# EAGLE board BusPirate-v3b (EAGLE 5.06)
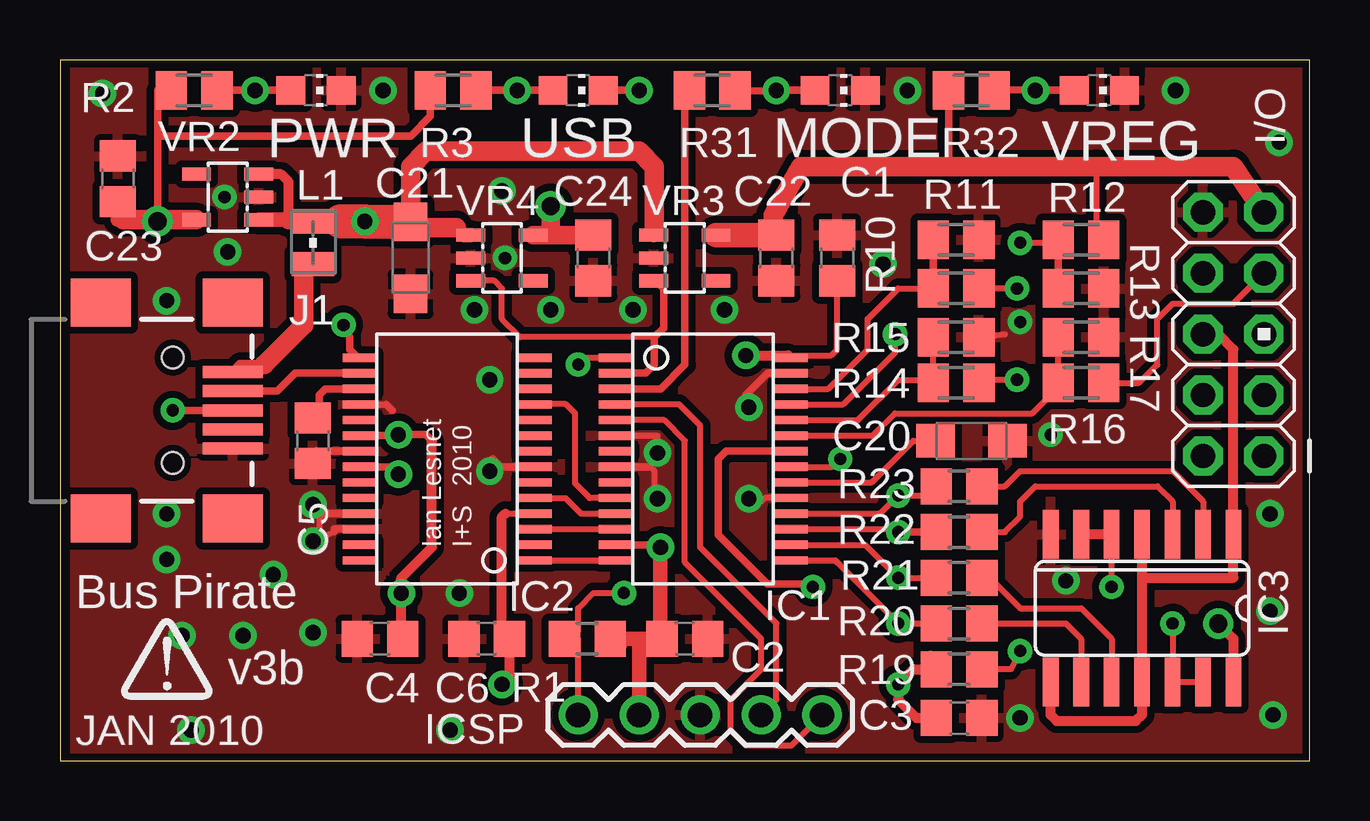
[diagram p0: board, top side]
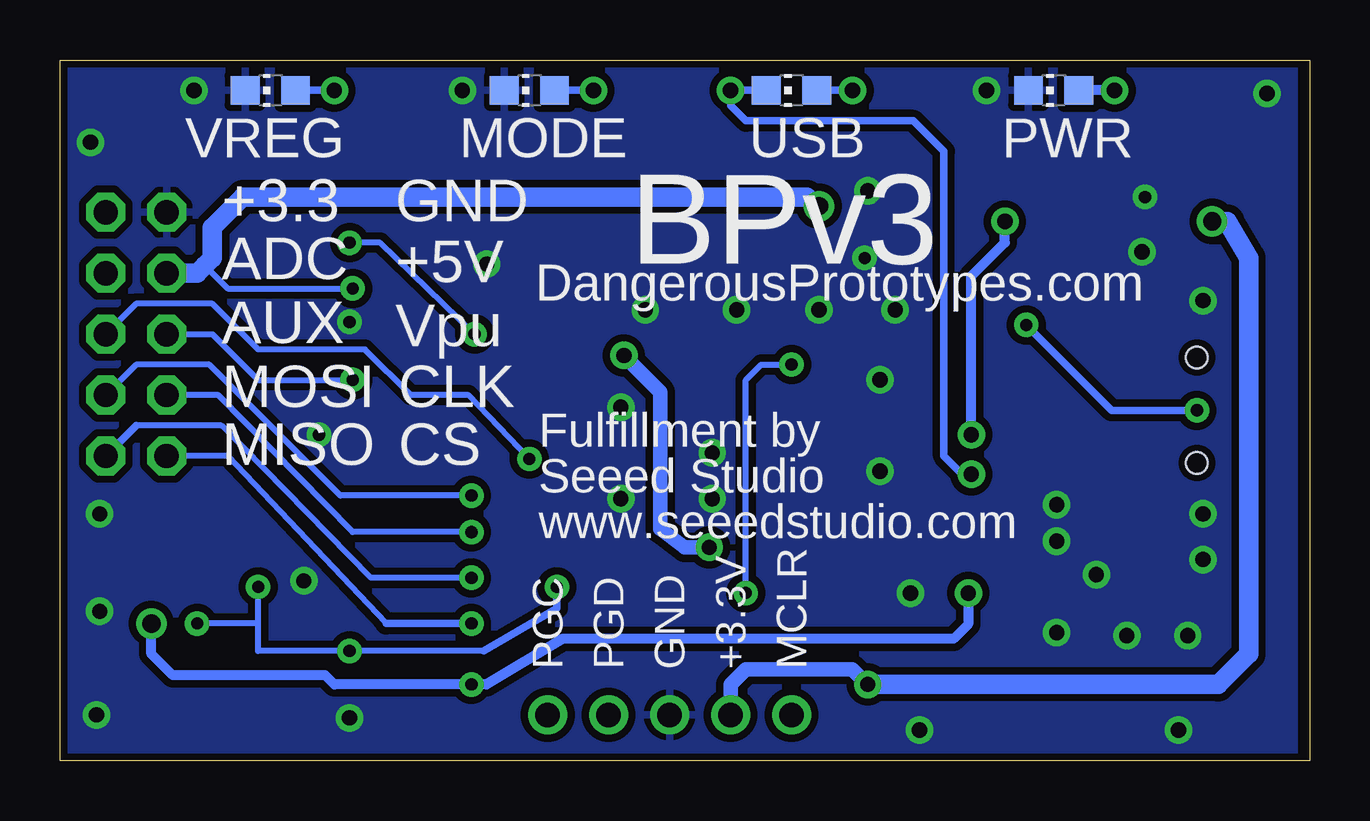
[diagram p1: board, bottom side, seen from below]

Size 52.07 x 29.21 mm. Coordinates in mm from the lower left corner, seen from the top.
Outline: 0,29.21 0,0 52.07,0 52.07,29.21 0,29.21
Copper layers (1*16): Top 0.035mm / dielectric 1.5mm / Bottom 0.035mm
Design rules "SparkFun": minimum track width 8mil, minimum drill 20mil, track to track 8mil, track to pad 8mil, pad to pad 8mil, via to via 8mil, smd to smd 8mil, copper to edge 10mil, drill to drill 8mil, minimum pad ring 12mil, minimum via ring 10mil, stop-mask expansion 4mil, vias tented up to drill 25mil, thermal gap 10mil
tRestrict: area 12.1,9.9 to 13,10

## Footprints (pad centres in the part's own frame; a part is rotated, then mirrored left to right if it is on the bottom)
C0805 = smd 1.3 x 1.5: 1 -0.95,0; 2 0.95,0
SMC_A = smd 1.6 x 1.4: + -1.5,0; - 1.5,0
AVR_ICSP = drill 1.016 octagon: 1 -1.27,5.08; 2 1.27,5.08; 3 -1.27,2.54; 4 1.27,2.54; 5 -1.27,0; 6 1.27,0; 7 -1.27,-2.54; 8 1.27,-2.54; 9 -1.27,-5.08; 10 1.27,-5.08
SSOP28DB = smd 0.348 x 1.397: 1 -4.225,-3.656; 2 -3.575,-3.656; 3 -2.925,-3.656; 4 -2.275,-3.656; 5 -1.625,-3.656; 6 -0.975,-3.656; 7 -0.325,-3.656; 8 0.325,-3.656; 9 0.975,-3.656; 10 1.625,-3.656; 11 2.275,-3.656; 12 2.925,-3.656; 13 3.575,-3.656; 14 4.225,-3.656; 15 4.225,3.656; 16 3.575,3.656; 17 2.925,3.656; 18 2.275,3.656; 19 1.625,3.656; 20 0.975,3.656; 21 0.325,3.656; 22 -0.325,3.656; 23 -0.975,3.656; 24 -1.625,3.656; 25 -2.275,3.656; 26 -2.925,3.656; 27 -3.575,3.656; 28 -4.225,3.656
SO14 = smd 0.66 x 2.032: 1 -3.81,-3.073; 2 -2.54,-3.073; 3 -1.27,-3.073; 4 0,-3.073; 5 1.27,-3.073; 6 2.54,-3.073; 7 3.81,-3.073; 8 3.81,3.073; 9 2.54,3.073; 10 1.27,3.073; 11 0,3.073; 12 -1.27,3.073; 13 -2.54,3.073; 14 -3.81,3.073
1X05 = drill 1.016 round: 1 0,0; 2 2.54,0; 3 5.08,0; 4 7.62,0; 5 10.16,0
USB-MINIB = smd 2.5 x 0.5: D+ 2.5,0; D- 2.5,0.8; GND 2.5,-1.6; ID 2.5,-0.8; VBUS 2.5,1.6 | smd 2.5 x 2: GND@1 -3,-4.5; GND@2 -3,4.5; GND@3 2.5,4.5; GND@4 2.5,-4.5 | hole 0.9: 0,2.2; 0,-2.2
WE-KI_0805_B = smd 1.02 x 1.78: 1 -0.89,0; 2 0.89,0
CHIP-LED0805 = smd 1.2 x 1.2: A 0,-1.05; C 0,1.05
R0805 = smd 1.3 x 1.5: 1 -0.95,0; 2 0.95,0
M0805 = smd 1.3 x 1.6: 1 -0.95,0; 2 0.95,0
SOT23-5 = smd 0.55 x 1.2: 1 -0.95,-1.3; 2 0,-1.3; 3 0.95,-1.3; 4 0.95,1.3; 5 -0.95,1.3

## Placement (x,y rotation side)
C1  0.1uF  [C0805]  32.38,20.95 90 top
C2  0.1uF  [C0805]  26.04,5.08 0 top
C3  0.1uf  [C0805]  37.46,1.78 0 top
C4  0.1uF  [C0805]  13.33,5.08 180 top
C5  0.1uF  [C0805]  10.54,13.34 270 top
C6  0.1uF  [C0805]  17.78,5.08 180 top
C20  10uF  [SMC_A]  37.97,13.34 0 top
C21  10uF  [SMC_A]  14.61,20.95 270 top
C22  1uF  [C0805]  29.85,20.95 270 top
C23  1uf  [C0805]  2.41,24.26 90 top
C24  1uF  [C0805]  22.23,20.95 270 top
I/O  M05X2PTH  [AVR_ICSP]  48.89,17.78 180 top
IC1  PIC24FJ64GA002-I/SSSS-ALTERNATE  [SSOP28DB]  26.8,12.57 270 top
IC2  FT232RLSSOP  [SSOP28DB]  16.13,12.57 90 top
IC3  4066D  [SO14]  45.09,6.35 180 top
ICSP  M05X1PTH  [1X05]  21.59,1.91 0 top
J1  USBSMD  [USB-MINIB]  4.7,14.61 0 top
L1  700mA+ ferrite bead  [WE-KI_0805_B]  10.54,21.59 270 top
LED1  [CHIP-LED0805]  10.67,27.94 270 top
LED1A  [CHIP-LED0805]  10.67,27.94 90 bottom
LED2  [CHIP-LED0805]  32.51,27.94 270 top
LED2A  [CHIP-LED0805]  32.51,27.94 90 bottom
LED3  [CHIP-LED0805]  43.31,27.94 270 top
LED3A  [CHIP-LED0805]  43.31,27.94 90 bottom
LED4  [CHIP-LED0805]  21.59,27.94 270 top
LED4A  [CHIP-LED0805]  21.59,27.94 90 bottom
R1  2K  [R0805]  21.97,5.08 0 top
R2  1K1  [M0805]  5.59,27.94 180 top
R3  1K1  [M0805]  16.38,27.94 180 top
R10  10K  [M0805]  37.34,19.69 180 top
R11  10K  [M0805]  37.34,21.72 180 top
R12  10K  [M0805]  42.54,21.72 180 top
R13  10K  [M0805]  42.54,19.69 180 top
R14  10K  [M0805]  37.34,15.75 180 top
R15  10K  [M0805]  37.34,17.65 180 top
R16  10K  [M0805]  42.54,15.75 180 top
R17  10K  [M0805]  42.54,17.65 180 top
R19  10K  [R0805]  37.46,3.81 0 top
R20  10K  [R0805]  37.46,5.71 0 top
R21  10K  [R0805]  37.46,7.62 0 top
R22  10K  [R0805]  37.46,9.52 0 top
R23  2K  [R0805]  37.46,11.43 0 top
R31  1K1  [M0805]  27.18,27.94 180 top
R32  1K1  [M0805]  37.97,27.94 180 top
U$1  [DP-LOGO]  2.54,2.54 0 top
VR2  MIC5205-3.3YM5  [SOT23-5]  6.98,23.49 90 top
VR3  MIC5205-3.3YM5  [SOT23-5]  26.04,20.95 270 top
VR4  MIC5205-5.0YM5  [SOT23-5]  18.42,20.95 270 top

## Library data of the parts
C1-C6 C20-C24 R1 R2 R19-R23 R31 R32 = rcl
I/O IC2 ICSP J1 VR2-VR4 = SparkFun
IC1 = microchip-pic24
IC3 = 40xx
L1 = wuerth-elektronik
LED1 LED1A LED2 LED2A LED3 LED3A LED4 LED4A = led
R3 R10-R17 = resistor
U$1 = DP-logo

## Nets
$N26: J1.VBUS L1.2
ADC: I/O.7 R16.1
ADC1: IC1.23 R16.2 R17.2
ADC2: IC1.24 R14.2 R15.2
ADC3: IC1.25 R12.2 R13.2
ADC4: IC1.26 R10.2 R11.2
AUX1: I/O.5 IC1.21
CLK: I/O.4 IC1.17 R22.1
CS: I/O.2 IC1.15 R20.1
CTS: IC1.10 IC2.11
GND: C1.2 C2.2 C3.2 C4.2 C5.2 C6.2 C20.- C21.- C22.2 C23.2 C24.2 I/O.10 IC1.6 IC1.8 IC1.19 IC1.27 IC2.7 IC2.18 IC2.21 IC2.25 IC2.26 IC3.7 ICSP.3 J1.GND LED1.C LED1A.C LED2.C LED2A.C LED3.C LED3A.C R11.1 R13.1 R15.1 R17.1 VR2.2 VR3.2 VR4.2
LD1: IC1.3 R31.2
MCLR: IC1.1 ICSP.1 R1.1
MISO: I/O.1 IC1.16 R21.1
MOSI: I/O.3 IC1.18 R23.1
N$1: IC3.2 R23.2
N$2: IC3.3 R22.2
N$3: C20.+ IC1.20
N$4: IC3.10 R21.2
N$5: IC3.9 R20.2
N$6: LED2.A LED2A.A R31.1
N$7: LED1.A LED1A.A R2.1
N$9: C5.1 IC2.17
N$13: LED4.A LED4A.A R3.1
N$15: IC2.15 J1.D+
N$16: IC2.16 J1.D-
N$18: LED3.A LED3A.A R32.1
PGC: IC1.5 ICSP.5
PGD: IC1.4 ICSP.4
PULLUPEN: IC1.22 IC3.5 IC3.6 IC3.12 IC3.13 R19.2
RTS: IC1.12 IC2.3
RX: IC1.11 IC2.5
RXLED: IC2.22 LED4.C LED4A.C
SWV33: C22.1 I/O.9 R12.1 R32.2 VR3.5
SWV50: C24.1 I/O.8 R10.1 VR4.5
TP0: IC1.9
TP1: IC1.7
TX: IC1.14 IC2.1
V+: C3.1 C4.1 C21.+ IC2.20 IC3.14 L1.1 R19.1 VR2.1 VR2.3 VR3.1 VR4.1
VCC: C1.1 C2.1 C6.1 C23.1 IC1.13 IC1.28 IC2.4 ICSP.2 R1.2 R2.2 R3.2 VR2.5
VEXTERN: I/O.6 IC3.1 IC3.4 IC3.8 IC3.11 R14.1
VREGEN: IC1.2 VR3.3 VR4.3

## Tracks (layer width: path | path; a pad name or v marks a point on that pad's centre or on a via)
$N26
  Top 0.406: 8.51,16.51 7.5,16.51 J1.VBUS
  Top 0.813: L1.2 10.16,20.45 10.16,18.16 8.51,16.51
ADC
  Top 0.254: I/O.7 48.89,19.05 46.35,19.05 45.72,18.41 45.72,16.51 44.96,15.75 R16.1
ADC1
  Top 0.254: R17.2 R16.2 41.59,15.24 41.27,15.24 40.51,14.48 34.8,14.48 33.87,13.55 IC1.23
ADC2
  Top 0.254: R15.2 R14.2 36.39,15.88 34.92,15.88 33.25,14.2 IC1.24
ADC3  (via drill 0.51)
  Top 0.254: v34.8,17.78 34.8,17.02 32.63,14.85 IC1.25 | v40,21.59 41.47,21.59 R12.2
  Top 0.305: R13.2 R12.2 41.59,21.91
  Bottom 0.254: v40,21.59 38.73,21.59 v34.8,17.78
ADC4
  Top 0.254: IC1.26 32.01,15.5 33.66,17.15 33.66,18.41 34.92,19.69 R10.2
  Top 0.305: R10.2 R11.2
  Top 0.406: R10.2 36.2,19.69
AUX1  (via drill 0.51)
  Top 0.254: IC1.21 32.19,12.25 v32.51,12.57
  Bottom 0.254: I/O.5 48.89,19.05 45.72,19.05 43.81,17.15 39.37,17.15 37.46,15.24 35.05,15.24 v32.51,12.57
CLK  (via drill 0.51)
  Top 0.254: IC1.17 34.8,9.65 v34.92,9.52
  Top 0.305: v34.92,9.52 R22.1
  Bottom 0.254: I/O.4 45.47,15.24 39.88,9.52 v34.92,9.52
CS  (via drill 0.51)
  Top 0.254: R20.1 v34.92,5.71 32.38,8.25 | 32.38,8.25 32.35,8.29 | IC1.15 32.29,8.35 32.38,8.25
  Bottom 0.254: I/O.2 45.09,12.7 38.48,5.71
  Bottom 0.305: v34.92,5.71 38.48,5.71
CTS
  Top 0.254: IC1.10 22.07,10.95 21.46,11.56 21.46,14.48 21.08,14.86 19.8,14.86 IC2.11
GND  (via drill 0.51, 0.64)
  Top 0.254: IC2.18 13.6,14.85 | R15.1 39.37,17.78 | 24.58,12.25 24.77,12.07 24.77,11.05 v24.89,10.92 | IC1.19 29.36,10.95 29.21,10.8 | 10.79,10.16 10.79,9.52 | v10.54,9.14 11.43,9.52 | IC1.6 24.89,13.55 v24.89,12.83
  Top 0.305: IC2.7 18.36,12.25 18.03,12.57 | 13.6,14.85 13.84,14.61 | IC1.27 29.48,16.15 28.58,15.24 28.58,14.86 v28.7,14.73 | IC1.8 24.58,12.25 | IC2.21 10.66,12.9 C5.2 | IC2.25 10.93,10.3 10.79,10.16 | IC2.26 11.43,9.65 11.43,9.52
  other vias: 41.91,7.49 50.42,6.22 50.55,1.91 41.27,13.59 40,18.29 34.29,20.7 4.45,10.29 4.45,19.18 35.31,27.94 28.7,10.92 40,1.78 50.42,10.29 50.8,25.78 23.88,18.8 20.45,18.8 18.42,23.75 17.27,18.8 17.91,15.88 5.08,5.21 4.45,8.38 10.54,10.67 13.46,27.94 27.69,18.8 18.54,20.95 5.46,1.27 46.48,27.94 8.89,7.75 17.91,12.07 7.62,5.21 1.78,27.81 16.64,6.98 10.54,5.33 16.26,1.27 6.86,23.49 6.98,21.21
  pour Top (isolate 0.305): 0.64,29.21 52.07,29.21 52.07,0 0.64,0
  pour Bottom (isolate 0.305): 0.64,29.21 52.07,29.21 52.07,0 0.64,0
LD1
  Top 0.305: IC1.3 25.02,15.5 26.04,16.51 26.04,27.62
  Top 0.406: 26.04,27.62 R31.2
MCLR  (via drill 0.51)
  Top 0.254: IC1.1 21.88,16.8 v21.59,16.51 | v23.5,6.98 22.23,6.98 21.59,6.35 21.59,5.39 R1.1 21.59,5.08 ICSP.1
  Bottom 0.254: v21.59,16.51 22.86,16.51 23.5,15.88 v23.5,6.98
MISO  (via drill 0.51)
  Top 0.254: v34.92,7.62 R21.1 | v34.92,7.62 34.82,7.73 | IC1.16 33.55,9 v34.92,7.62
  Bottom 0.254: 48.89,13.97 45.34,13.97 39.12,7.62 v34.92,7.62
  Bottom 0.305: 48.89,13.97 I/O.1
MOSI  (via drill 0.51)
  Top 0.254: IC1.18 34.17,10.3 v34.92,11.05 36.13,11.05 R23.1
  Bottom 0.254: I/O.3 48.89,16.51 45.85,16.51 40.39,11.05 v34.92,11.05
N$1
  Top 0.254: IC3.2 47.62,10.8 46.35,12.07 40,12.07 39.37,11.43 R23.2
N$2
  Top 0.254: R22.2 39.37,9.52 40,10.16 40,10.8 40.64,11.43 45.72,11.43 46.35,10.8 IC3.3
N$3
  Top 0.254: IC1.20 33.82,11.6 35.56,13.34 C20.+
N$4
  Top 0.254: R21.2 38.73,7.62 40,6.35 42.54,6.35 43.81,5.08 IC3.10
N$5
  Top 0.254: R20.2 41.91,5.71 42.54,5.08 IC3.9
N$6  (via drill 0.64)
  Top 0.305: 28.29,27.91 LED2A.A v29.85,27.94
  Top 0.406: R31.1 28.29,27.91
  Bottom 0.305: v29.85,27.94 LED2A.A
N$7  (via drill 0.64)
  Top 0.305: LED1A.A v8.13,27.94 R2.1
  Top 0.406: R2.1 6.35,27.94
  Bottom 0.406: v8.13,27.94 LED1A.A
N$9
  Top 0.305: IC2.17 11.05,15.5 10.79,15.24 10.79,14.54 C5.1
N$13  (via drill 0.64)
  Top 0.305: R3.1 v19.05,27.94 | v19.05,27.94 LED4A.A v19.05,27.94
  Bottom 0.305: v19.05,27.94 LED4A.A
N$15  (via drill 0.51)
  Top 0.305: v4.7,14.61 J1.D+ | IC2.15 12.41,16.8 12.06,17.15 12.06,17.65 v11.81,18.16
  Bottom 0.305: v4.7,14.61 8.26,14.61 v11.81,18.16
N$16
  Top 0.254: IC2.16 12.49,16.13
  Top 0.305: J1.D- 9.05,15.41 9.8,16.15 IC2.16
N$18  (via drill 0.64)
  Top 0.305: R32.1 42.23,27.97 | LED3A.A v40.64,27.94
  Top 0.406: 42.23,27.97 LED3A.A
  Bottom 0.305: v40.64,27.94 LED3A.A
PGC
  Top 0.254: IC1.5 25.17,14.2 26.04,13.34 26.04,8.25 29.21,5.08 29.21,3.81 27.94,2.54 27.94,1.27 28.58,0.64 30.48,0.64 ICSP.5
PGD
  Top 0.254: IC1.4 25.79,14.85 26.67,13.97 26.67,8.89 29.85,5.71 29.85,2.54 ICSP.4
PULLUPEN  (via drill 0.51)
  Top 0.254: v46.35,5.71 IC3.12 IC3.13 | v43.81,7.24 IC3.5 | R19.2 39.62,3.81 v40,4.57
  Top 0.305: IC1.22 27.76,12.9 27.43,12.57 27.43,9.4 29.46,7.37 31.24,7.37 v31.37,7.24
  Top 0.406: IC3.5 IC3.6
  Bottom 0.254: 43.81,5.71 43.81,4.57 v40,4.57 34.42,4.57 | 43.81,5.71 v43.81,7.24 | 43.81,5.71 v46.35,5.71
  Bottom 0.305: v31.37,7.24 31.37,6.35 34.42,4.57
RTS
  Top 0.254: IC2.3 IC1.12
RX
  Top 0.254: IC1.11 21.71,10.3 21.06,10.95 IC2.5
RXLED  (via drill 0.64)
  Top 0.305: v24.13,27.94 LED4A.C | IC2.22 14.03,12.25 v14.1,11.94
  Top 0.406: LED4A.C 22.23,27.94
  Bottom 0.305: LED4A.C v24.13,27.94 24.13,27.3 23.5,26.67 16.51,26.67 15.24,25.4 15.24,12.7 14.48,11.94 v14.1,11.94
SWV33
  Top 0.254: R12.1 43.18,21.59 43.18,24.77
  Top 0.305: 37.02,24.83 R32.2
  Top 0.406: R32.2 37.15,27.94 | 36.83,24.77 37.02,24.83
  Top 0.61: 29.72,21.91 C22.1 29.17,21.91
  Top 0.813: I/O.9 48.89,24.77 43.18,24.77 36.83,24.77 30.86,24.77 29.72,22.73 29.72,21.91
  Top 1.016: VR3.5 29.17,21.91
SWV50  (via drill 0.51, 0.76)
  Top 0.254: v39.88,19.69 R10.1
  Top 0.61: 20.32,21.91 20.45,22.03 | 21.68,21.91 C24.1
  Top 0.762: VR4.5 20.32,21.91 21.68,21.91 | 20.45,22.03 v20.45,23.11
  Bottom 0.254: v39.88,19.69 45.09,19.69 46.04,20.64
  Bottom 0.61: 20.7,23.24 20.96,23.49
  Bottom 0.813: I/O.8 46.35,20.32 46.04,20.64 45.72,20.95 45.72,22.23 44.45,23.49 20.96,23.49 | v20.45,23.11 20.7,23.24
TX
  Top 0.254: IC2.1 IC1.14
V+  (via drill 0.51, 0.64, 0.76)
  Top 0.254: IC3.14 48.89,2.86 | 36.26,4.38 R19.1 36.52,3.49
  Top 0.305: IC2.20 14.06,13.55 v14.1,13.59 15.24,13.59 15.49,13.34
  Top 0.406: C4.1 14.22,5.78 14.22,7.62 | 36.26,4.38 36.26,3.88 36.2,3.81 35.56,3.81 v34.92,3.18 34.92,2.54 35.69,1.78 C3.1 | 14.22,7.62 v14.22,6.98 | 14.22,7.62 15.49,8.89 15.49,13.34 | IC3.14 48.89,5.08 v48.26,5.71 | 9.53,22.55 9.53,24.13 9.21,24.45 VR2.3 8.26,24.48
  Top 0.61: 9.53,22.55 VR2.1 | VR4.1 16.83,21.91 16.51,22.23 | VR3.1 24.74,22.2 24.77,22.23
  Top 0.813: 14.61,22.48 14.61,24.77 15.24,25.4 24.13,25.4 24.77,24.77 24.77,22.23 | 16.51,22.23 14.83,22.23 C21.+ | 9.53,22.55 10.48,22.55 L1.1
  Top 1.016: 14.61,22.48 C21.+ | v12.7,22.48 | L1.1 11.68,22.48
  Top 1.422: 14.61,22.48 v12.7,22.48 11.68,22.48
  Bottom 0.406: v48.26,5.71 48.26,4.45 47.37,3.56 41.02,3.56 40.64,3.18 v34.92,3.18 34.29,3.18 31.12,5.08 14.83,5.08 14.23,5.68 v14.23,6.98 v14.22,6.98 | v14.1,13.59 14.1,20.19 12.7,21.59 v12.7,22.48
VCC  (via drill 0.64, 0.76)
  Top 0.254: R1.2 23.5,4.76 | 30.33,16.89 32.13,16.89 32.38,17.15 C1.1 | 18.55,10.3 IC2.4 | C6.1 18.42,5.39
  Top 0.305: IC1.13 24.91,9 v25.02,8.89 | 30.33,16.89 30.36,16.89 IC1.28 | R2.2 4.06,27.94 4.06,26.03 | v4.06,22.48 4.06,26.03 | R3.2 15.43,26.86 14.61,26.03 4.06,26.03
  Top 0.406: 25.4,5.39 C2.1 25.02,5.4 | v25.02,8.89 24.66,9 | v28.58,16.89 30.33,16.89 | 18.55,10.3 18.42,10.16 18.42,5.39 | C6.1 18.73,3.49 v18.42,3.18 | R3.2 15.49,27.81
  Top 0.61: 24.13,5.08 R1.2 | 24.13,5.08 C2.1 | 25.02,5.4 v25.02,8.89 | ICSP.2 24.13,5.08 | 2.62,22.55 2.41,22.55 C23.1
  Top 0.813: 2.62,22.55 VR2.5 4.38,22.55 v4.06,22.48
  Bottom 0.61: ICSP.2 24.13,3.18 23.5,3.81 19.05,3.81 v18.42,3.18 | v25.02,8.89 26.04,8.89 27.05,9.65 27.05,15.37 v28.58,16.89
  Bottom 0.813: v4.06,22.48 3.43,22.48 2.54,20.95 2.54,4.45 3.81,3.18 v18.42,3.18
VEXTERN  (via drill 0.51)
  Top 0.254: v39.88,15.88 38.41,15.88 R14.1
  Top 0.406: 45.09,7.62 48.89,7.62 IC3.1 48.89,17.15 48.26,17.78 I/O.6 | IC3.8 41.27,1.91 41.53,1.65 44.83,1.65 45.09,1.91 IC3.11 45.09,7.62 | 45.09,7.62 IC3.4
  Bottom 0.254: I/O.6 45.72,17.78 43.81,15.88 v39.88,15.88
VREGEN
  Top 0.254: VR4.3 18.1,20.01 18.42,19.69 18.42,18.41 19.18,17.65 24.77,17.65
  Top 0.305: VR3.3 24.77,19.98 24.86,19.98 25.15,19.69 25.15,18.03 24.77,17.65 24.77,16.51 24.4,16.15 IC1.2

## Text on the board
tNames: PWR | USB | MODE | VREG | 2010 | Ian Lesnet | I+S | Bus Pirate | v3b | JAN 2010
bNames: PWR | USB | MODE | VREG | GND | +3.3 | BPv3 | +5V | ADC | DangerousPrototypes.com | Vpu | AUX | CLK | MOSI | Fulfillment by | CS | MISO | Seeed Studio | www.seeedstudio.com | MCLR | +3.3V | GND | PGD | PGC
Reference: GND | +3v | +5v | ADC | Vpu | AUX1 | CLK | MOSI | USB | CS | MISO | I/O header | MCLR | +3.3V | GND | DATA | CLOCK | Bus Pirate v3b | Ian Lesnet | Programming Header | CC-0 | April 2010 | http://dangerousprototypes.com